# Altium PCB Staj.PcbDoc
Units mil, origin at the board's own origin, x right, y up, seen from the top; angles counter-clockwise.
Board outline 2510.03 x 1860.03 mil, 2 copper layers (Top Layer, Bottom Layer); 26 components, 16 nets, 122 pads, 35 vias.
Unrouted connection lines stored in the file: 1.
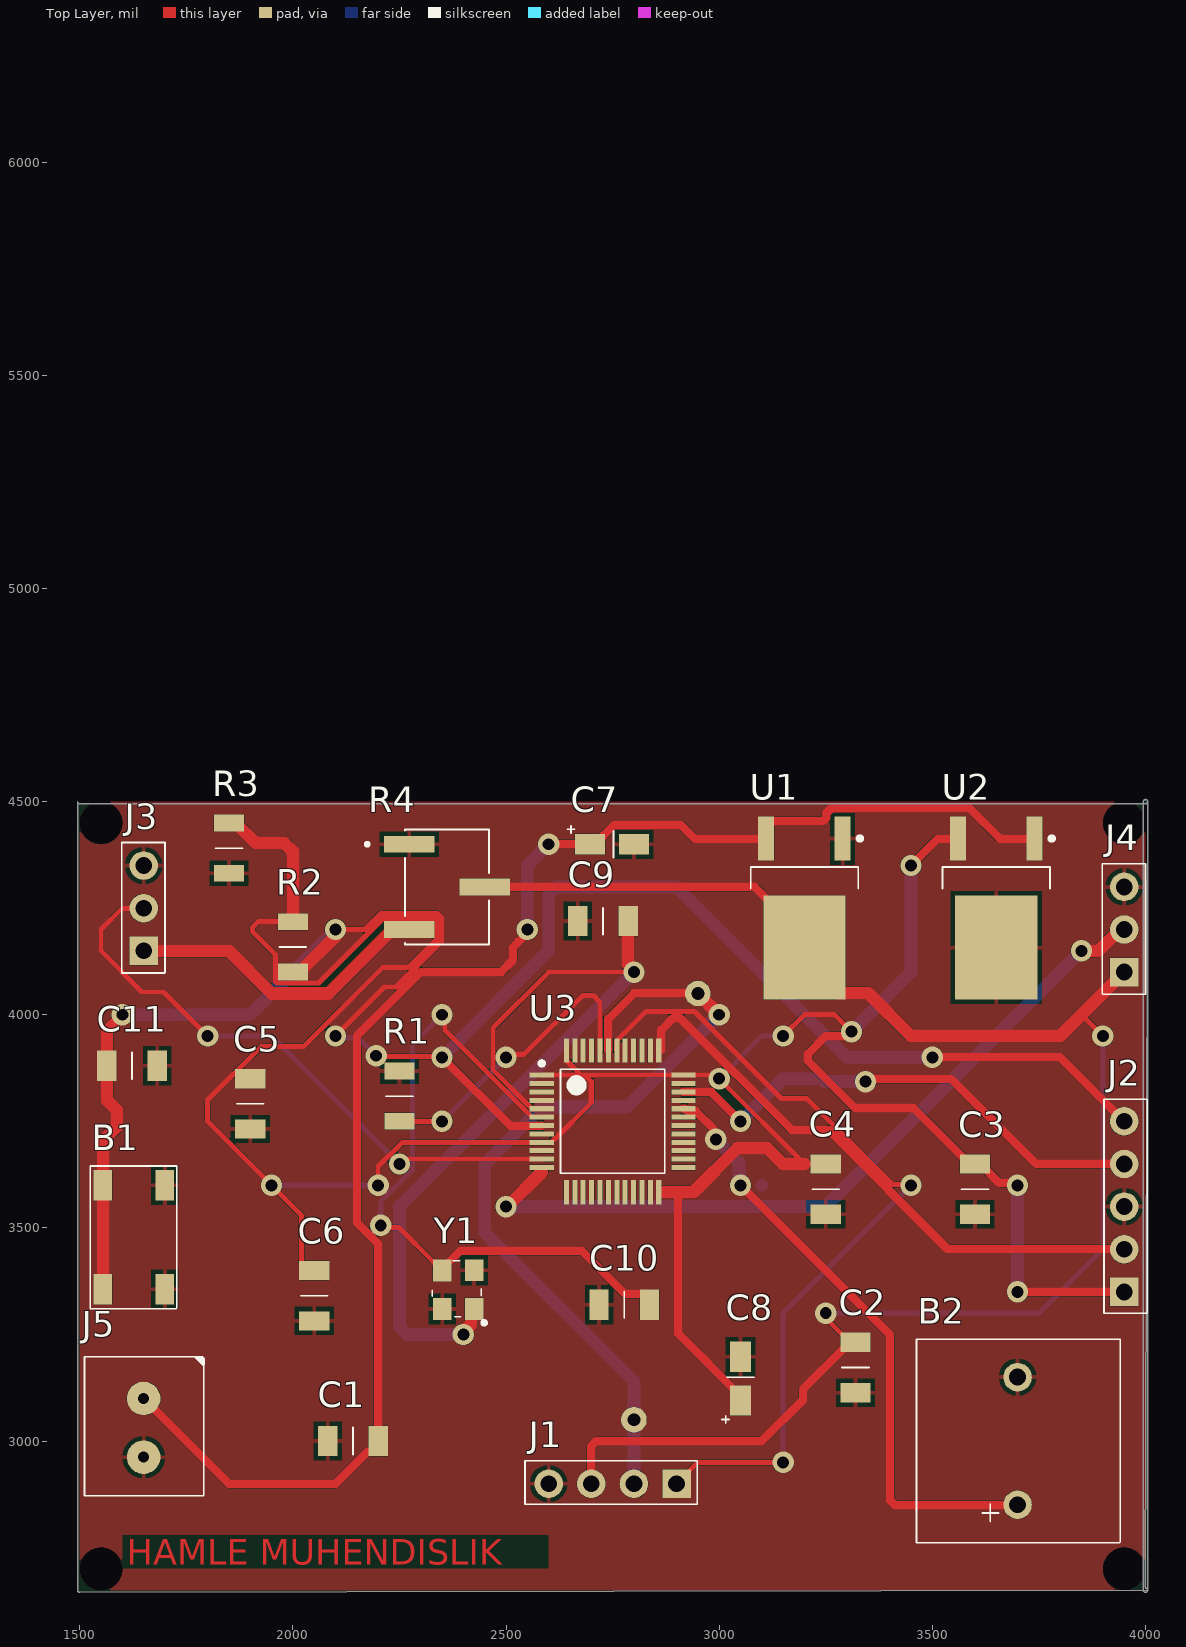
[diagram p0: Top Layer view]
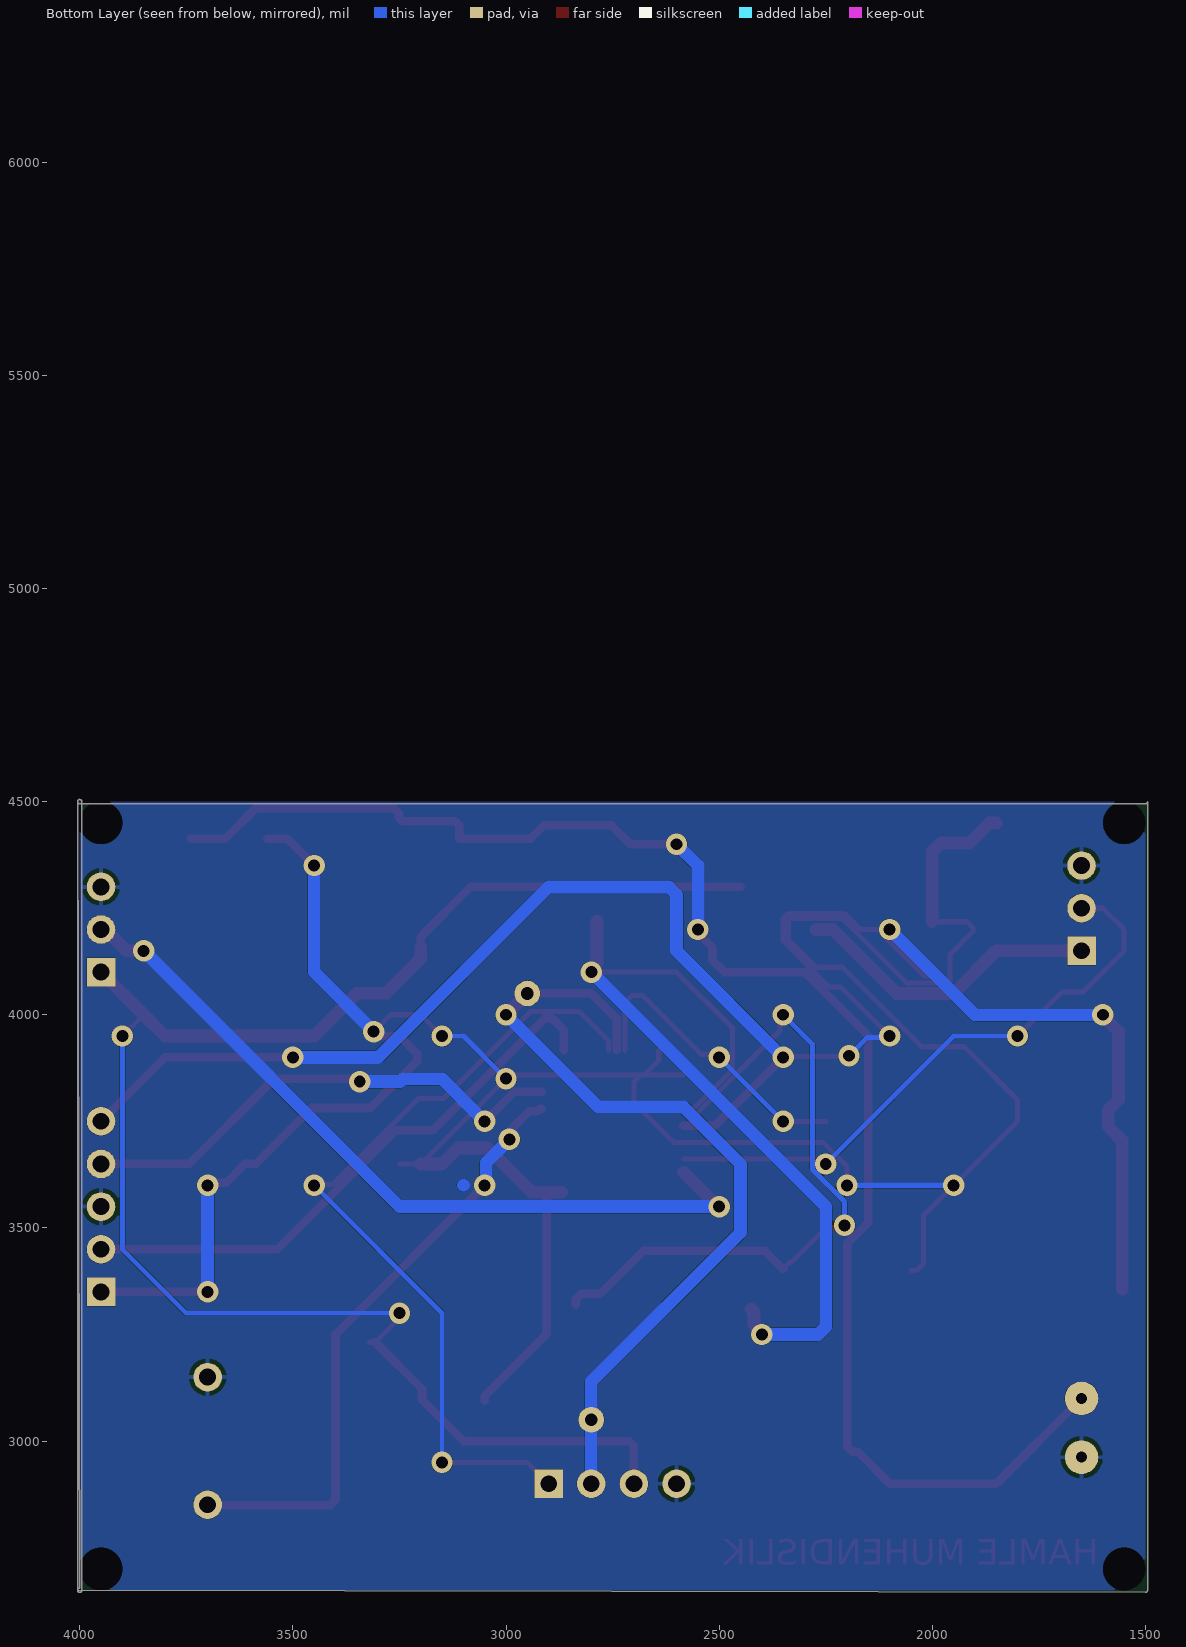
[diagram p1: Bottom Layer view, seen from below]
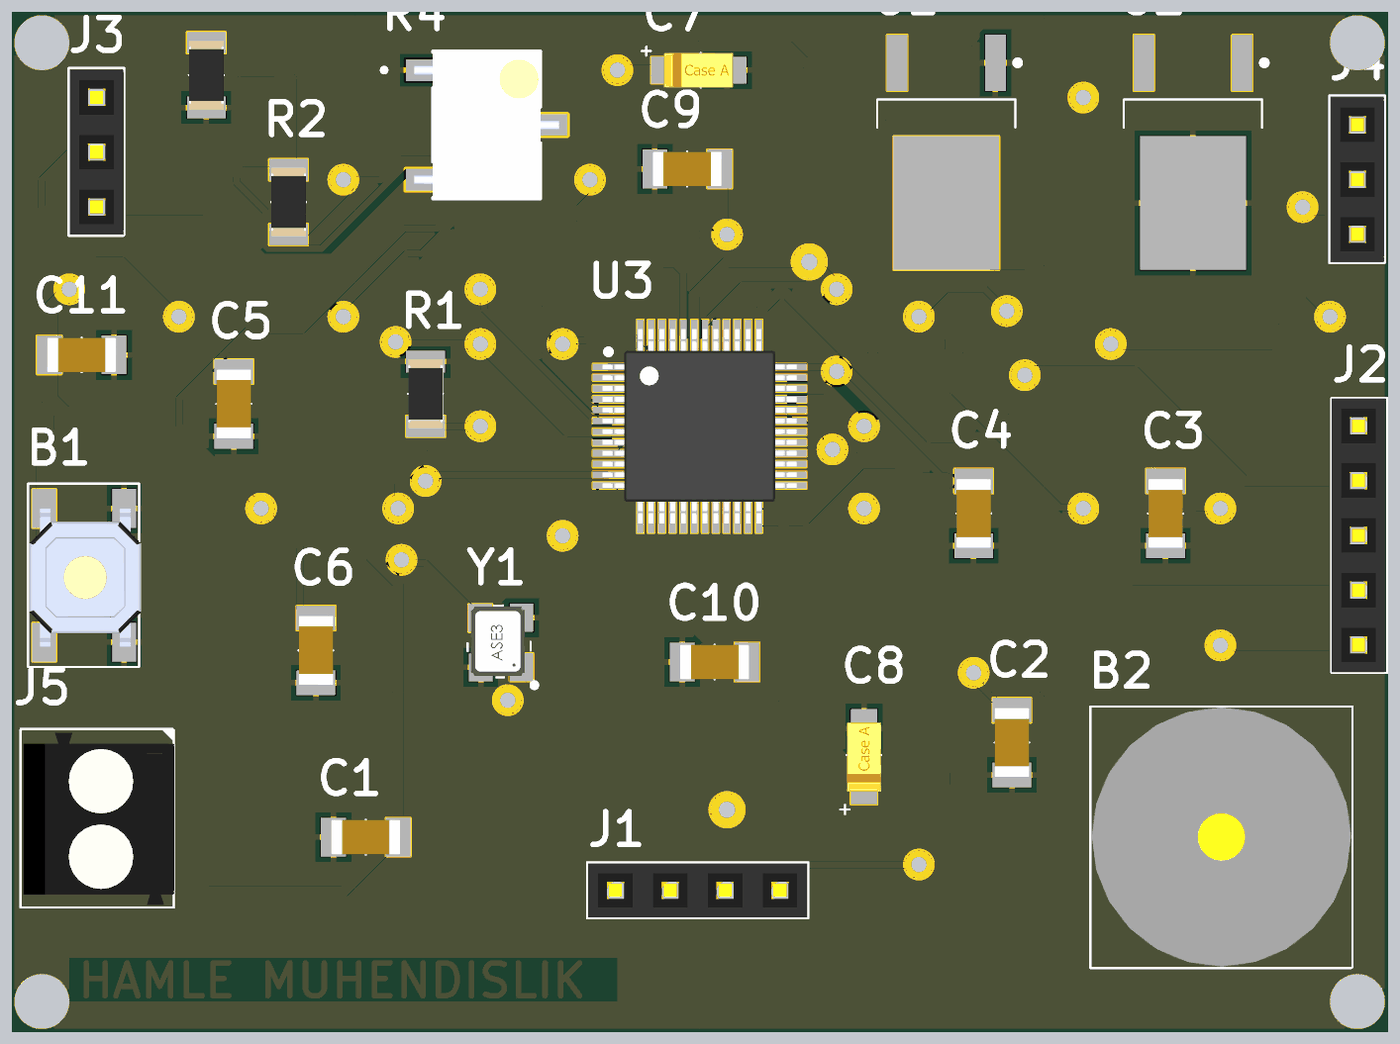
[diagram p2: 3D render of the assembled board from above, using the file's embedded part models]

## Layer stack, top to bottom
Top Solder: solder mask 0.4, Solder Resist, Dk 3.5
Top Layer: signal copper 1.4
Dielectric 1: dielectric 12.6, FR-4, Dk 4.8
Bottom Layer: signal copper 1.4
Bottom Solder: solder mask 0.4, Solder Resist, Dk 3.5

## Board outline
1500,2644.99 cw(c1500,2650) 1494.98,2650 1494.98,4500 ccw(c1500,4500) 1500,4494.98 4000,4494.98 ccw(c4000,4500) 4005.01,4500 ccw(c4000,4500) 4000,4505.02 ccw(c4000,4500) 3994.99,4500 3994.99,4494.98 3994.98,2655.01 3994.98,2650 ccw(c4000,2650) 4000,2644.99 ccw(c4000,2650) 4005.01,2650 4005.01,2650.03 4005.01,4500 4000,2655.01 cw(c4000,2650) 4005.01,2650.03 cw(c4000,2650)

## Design rules (kind name [scope] priority, off if disabled: settings)
Clearance [All] p1: gap=0 ignorepadtopadclearanceinfootprint=FALSE
HoleToHoleClearance [All] p1: gap=0 allowstackedmicrovias=TRUE
MinimumSolderMaskSliver [All] p1: minsoldermaskwidth=1
PolygonConnect [All] p1: connectstyle=Relief reliefconductorwidth=10 reliefentries=4 polygonreliefangle="90 Angle" airgapwidth=10
RoutingVias [All] p1: holewidth=28 width=50 viastyle="Through Hole" minholewidth=28 minwidth=50 maxholewidth=28 maxwidth=50
ShortCircuit [All] p1: allowed=TRUE
SilkToSilkClearance [All] p1: silktosilkclearance=0
SilkToSolderMaskClearance [IsPad] p1: minsilkscreentomaskgap=0 clearancetoexposedcopper=TRUE
SolderMaskExpansion [All] p1: expansion=4 istentingtop=FALSE
UnRoutedNet [All] p1: checkbadconnections=TRUE
Width [All] p1: maxlimit=30 minlimit=10 preferedwidth=12 minimp=50.000000 maximp=50.000000 favimp=50.000000
24 further rules are at their usual default settings.

## Components (designator, comment, footprint, x,y, rotation, side; value= is the part's Value field where it differs from the comment)
B1 "Push Button" "PUSB BUTTON-SMD" 1554.33,3355.91 r90 top
B2 "Buzzer 5v" "Buzzer 5v" 3700,2850.79 r90 top
C1 "330 nF C1206" C1206 2118.31,3019.69 r0 top
C2 "0.1 uF C1206" C1206 3300,3150 r90 top
C3 "0.1 uF C1206" C1206 3580.31,3568.31 r90 top
C4 "0.1 uF C1206" C1206 3230.31,3568.31 r90 top
C5 "0.1 uF C1206" C1206 1880.31,3768.31 r90 top
C6 "0.1 uF C1206" C1206 2030.31,3318.31 r90 top
C7 "10 uF - Tantal" "C1206- TANTAL" 2751.97,4400 r0 top
C8 "10 uF - Tantal" "C1206- TANTAL" 3050,3150 r90 top
C9 "10 uF" C1206 2750,4200 r180 top
C10 "10 uF" C1206 2800,3300 r180 top
C11 "0.1 uF C1206" C1206 1600,3900 r0 top
J1 "Header 2.54 1x4" "Header 2.54 1x4" 2880.32,2871.46 r180 top
J2 "Header 2.54 1x5" "Header 2.54 1x5" 3950,3350 r90 top
J3 "Header 2.54 1x3" "Header 2.54 1x3" 1649.02,4150 r90 top
J4 "Header 2.54 1x3" "Header 2.54 1x3" 3949.02,4100 r90 top
J5 "Klemens 1x2 3.5mm" "Klemens 1x2 - 3.5mm" 1651.97,3037.01 r270 top
R1 "10K R1206" "R1206 Resıstor" 2250,3806.1 r90 top
R2 "10K R1206" "R1206 Resıstor" 2000,4162.01 r270 top
R3 "10K R1206" "R1206 Resıstor" 1850,4387.99 r90 top
R4 "TS63Y500KT20" TRIM_TS63Y500KT20 2361.42,4300 r0 top
U1 "LD108633 DPAK" DPAK228P972X230-3N 3200,4250 r270 top
U2 "L7805-DPAK" DPAK228P972X230-3N 3650,4250 r270 top
U3 "STM32F101" LQFP48-STM 2750,3750 r0 top
Y1 "8 MHz 12.5 pf Osc" "8 MHZ Osc." 2405.8,3348.69 r90 top

## Footprints (in the part's own frame and the unit in brackets; to place one, negate y for a bottom-side part, rotate by r counter-clockwise, add the part's x,y. Pads: shape width x height; smd on the part's side, far side on the other; paste and mask are expansions set on the pad)
"8 MHZ Osc." [mm]
  rect 1.3x1.1 smd mask+0.05: 1(-0.981,-0.49) 2(1.319,-0.49) 3(1.303,1.417) 4(-0.986,1.401)
  silkscreen extent -1.91,-1.19 1.88,2.01, body extent -1.38,-0.64 1.82,1.86, height 1.22
"Buzzer 5v" [mm]
  round 1.7 hole 1 mask+0.05: 1(0,0) 2(7.6,0)
  silkscreen extent -2.27,-6.12 9.85,6.02, body extent -2.2,-6.05 9.8,5.95, height 9.5
C1206 [mm]
  rect 1.15x1.8 smd mask+0.05: 1(-0.925,-0.5) 2(2.075,-0.5)
  silkscreen extent 0.58,-1.3 0.58,0.31, body extent -1.02,-1.3 2.18,0.3, height 1
"C1206- TANTAL" [mm]
  rect 1.8x1.23 smd mask+0.05: 1(-1.4,0) 1(-1.4,0) 2(1.22,0)
  silkscreen extent -2.74,-0.8 0,1.1, body extent -1.7,-0.8 1.5,0.8, height 1.62
DPAK228P972X230-3N [mm] "D-PAK, 3-Pads, Body 6,40x6,56mm (max), IPC Medium Density"
  rect 2.6x0.95 smd mask+0.05: 1(-4.15,2.28) 2(-4.15,-2.28)
  rect 6.2x4.9 smd mask+0.05: 3(2.35,0)
  silkscreen extent -4.27,-3.2 -1.15,3.43, body extent -2.5,-3.2 4.1,3.2, height 2.3
"Header 2.54 1x3" [mm]
  rect 1.7x1.7 hole 1 mask+0.05: 1(0,-0.025)
  round 1.7 hole 1 mask+0.05: 2(2.54,-0.025) 3(5.08,-0.025)
  silkscreen extent -1.33,-1.3 6.45,1.28, body extent -1.26,-1.27 6.36,1.23, height 9.1
"Header 2.54 1x4" [mm]
  rect 1.7x1.7 hole 1 mask+0.05: 1(-0.5,-0.725)
  round 1.7 hole 1 mask+0.05: 2(2.04,-0.725) 3(4.58,-0.725) 4(7.12,-0.725)
  silkscreen extent -1.73,-2.1 8.52,0.5, body extent -1.68,-2.05 8.48,0.45, height 9.1
"Header 2.54 1x5" [mm]
  rect 1.7x1.7 hole 1 mask+0.05: 1(0,0)
  round 1.7 hole 1 mask+0.05: 2(2.54,0) 3(5.08,0) 4(7.62,0) 5(10.16,0)
  silkscreen extent -1.28,-1.37 11.48,1.2, body extent -1.25,-1.3 11.45,1.2, height 9.1
"Klemens 1x2 - 3.5mm" [mm]
  round 2 hole 0.65: 1(-1.6,-0.05) 2(1.9,-0.05)
  silkscreen extent -4.11,-3.58 4.2,3.58, body extent -3.9,-3.45 4.09,3.55, height 8.9
LQFP48-STM [mm] "TSQFP, 48-Leads, Body 7,00x7,00mm, Pitch 0,50mm, IPC Medium Density"
  rect 1.45x0.3 smd mask+0.05: 1(-4.225,2.75) 2(-4.225,2.25) 3(-4.225,1.75) 4(-4.225,1.25) 5(-4.225,0.75) 6(-4.225,0.25) 7(-4.225,-0.25) 8(-4.225,-0.75) 9(-4.225,-1.25) 10(-4.225,-1.75) 11(-4.225,-2.25) 12(-4.225,-2.75) 25(4.225,-2.75) 26(4.225,-2.25) 27(4.225,-1.75) 28(4.225,-1.25) 29(4.225,-0.75) 30(4.225,-0.25) 31(4.225,0.25) 32(4.225,0.75) 33(4.225,1.25) 34(4.225,1.75) 35(4.225,2.25) 36(4.225,2.75)
  rect 0.3x1.45 smd mask+0.05: 13(-2.75,-4.225) 14(-2.25,-4.225) 15(-1.75,-4.225) 16(-1.25,-4.225) 17(-0.75,-4.225) 18(-0.25,-4.225) 19(0.25,-4.225) 20(0.75,-4.225) 21(1.25,-4.225) 22(1.75,-4.225) 23(2.25,-4.225) 24(2.75,-4.225) 37(2.75,4.225) 38(2.25,4.225) 39(1.75,4.225) 40(1.25,4.225) 41(0.75,4.225) 42(0.25,4.225) 43(-0.25,4.225) 44(-0.75,4.225) 45(-1.25,4.225) 46(-1.75,4.225) 47(-2.25,4.225) 48(-2.75,4.225)
  silkscreen extent -4.35,-3.1 3.1,3.57, body extent -4.5,-4.5 4.5,4.5, height 1.6
"PUSB BUTTON-SMD" [mm]
  rect 1.8x1.1 smd mask+0.05: 1(0,0) 2(6.2,0) 3(0,-3.7) 4(6.2,-3.7)
  silkscreen extent -1.15,-4.4 7.35,0.75, body extent -0.2,-4.5 6.2,0.7, height 1.5
"R1206 Resıstor" [mm]
  rect 1x1.8 smd mask+0.05: 1(-1.425,0) 2(1.575,0)
  silkscreen extent 0.08,-0.8 0.08,0.81, body extent -1.52,-0.8 1.68,0.81, height 0.55
TRIM_TS63Y500KT20 [mm]
  rect 3x1 smd: 1(-2.25,2.54) 2(2.25,0) 3(-2.25,-2.54)
  silkscreen extent -4.85,-3.42 2.5,3.42, body extent -3.35,-3.42 3.35,3.42, height 8

## Part data
B1: "Smd Push Button", Satın Alma Linki=https://urun.n11.com/diger/mini-pushbutton-switch-smd-P227461537?gclid=Cj0KCQjwkoDmBRCcARIsAG3xzl8Y_-jeD7HocNM6lvuZ_rVp83568XPGtNzlPwXWLph8oCRqo0yh87UaApZYEALw_wcB&gclsrc=aw.ds
R4: Package=None, Availability=Unavailable, MF="{'manufacturer': u'Vishay Dale'}", MP=TS63Y500KT20, Price=None
U1: "LD1086 3.3V REGULATOR"
U2: "L7805 5V REGULATOR. SMD PAKET"
U3: "STM32F101 48 PİNLİ MİKROİŞLEMCİ"

## Free pads (board coordinates)
  round 0 hole 100: 5(1550,2700) 5(1550,4450) 5(1550,4450) 5(1550,6200) 5(3950,2700) 5(3950,4450)
  round 60 hole 30: 6(2950,4050) 7(2800,3050)

## Via types
v1: diameter 50, hole 28, Top Layer to Bottom Layer, 35 vias

## Nets (pads, with @x,y where several pads share a name; then routed paths per layer and width w, separated by ;. In a path a pad name is that pad's centre, name@x,y a point inside that pad or via, vN(x,y) a via of type N, cw(c..) or ccw(c..) an arc to the next point about the centre after c; other vN are vias at no path point)
3.3V: C3.2 C4.2 C5.2 C6.2 C8.1 J2.1 R2.1 R3.2 U2.2 U3.1 U3.9 U3.24 U3.36 U3.48 | length 7176.4
  Top Layer w12: R2.1 1918.11,4218.11 1904.97,4204.97 1904.97,4195.03 1958.57,4141.43 1958.57,4077.83 1962.08,4074.31 2059.92,4074.31 2211.29,4225.69 2334.37,4225.69 2337.89,4222.17 2337.89,4177.83 2271.49,4111.43 2211.43,4111.43 2025,3925 1925,3925 1800,3800 1800,3750 v1(1950,3600) 2020.57,3529.43 2020.57,3416.64 2037.2,3400 C6.2 ; v1(2200,3600) 2200,3643.84 2256.95,3700.79 U3.9 2606.11,3700.79 2613.89,3708.57 2614.69,3708.57 2700,3793.88 2700,3842.97 2684.7,3858.27 ; U3.1 2676.55,3858.27 ; U3.48 2641.83,3916.24 2641.83,3893 2676.55,3858.27 ; v1(3150,3950) 3200,4000 3270.71,4000 3302.24,3968.47 v1@3302.24,3960.36 ; C4.2 3200,3650 v1(3000,3850) 2989.72,3850 2981.45,3858.27 U3.36 2684.7,3858.27 ; 2676.55,3858.27 2684.7,3858.27
  Top Layer w20: 2904.24,3583.66 2904.24,3251.86 3050,3106.1 C8.1@3050,3094.88 ; v1@3291.88,3950 3250,3950 3208.28,3908.28 3208.28,3891.72 3318.68,3781.32 3455.89,3781.32 3587.2,3650 C3.2 3612.8,3650 3657.06,3605.74 3694.26,3605.74 v1(3700,3600) ; v1(3450,4350) 3513.39,4413.39 U2.2 ; v1(3700,3350) J2.1
  Top Layer w30: R3.2 1865.75,4450 1912.86,4402.89 1979.54,4402.89 2000,4382.43 R2.1 ; 2869.49,3583.66 2904.24,3583.66 2939,3583.66 3042.91,3687.57 3112.43,3687.57 3150,3650 3200,3650
  Bottom Layer w12: v1(1950,3600) v1(2200,3600) ; v1(3000,3850) 3100,3950 v1(3150,3950)
  Bottom Layer w30: v1(3310.36,3960.36) 3450,4100 v1(3450,4350) ; v1(3700,3350) v1(3700,3600)
5V: C2.2 J1.3 J4.1 R4.2 U1.3 | length 3935.1
  Top Layer w12: v1(3250,3300) 3257.27,3292.73 3257.27,3281.31 3306.89,3231.69 C2.2 ; 3850,4000 v1(3900,3950)
  Top Layer w20: R4.2 3083.07,4300 3200,4183.07 U1.3 ; J1.3 2700,2988.28 2711.72,3000 3100,3000 3197.13,3097.13 3197.13,3121.93 C2.2@3306.89,3231.69
  Top Layer w30: U1.3 3200,4131.89 3281.46,4050.43 3349.57,4050.43 3450,3950 3800,3950 3850,4000 J4.1
  Bottom Layer w12: v1(3250,3300) 3750,3300 3900,3450 v1(3900,3950)
9V: C1.2 C7.1 J5.1 U1.2 U2.1 | length 3442
  Top Layer w20: J5.1 1850,2900 2100,2900 2174.57,2974.57 2187.36,2974.57 2200,2987.2 C1.2 2200,3462.72 2150,3512.72 2150,3950 ; 2300,4100 2488.28,4100 2515.98,4127.69 2515.98,4157.86 2550,4191.88 v1(2550,4200) ; v1(2600,4400) 2696.85,4400 2708.07,4400 2752.28,4444.21 2911.5,4444.21 2942.32,4413.39 U1.2 3110.24,4445.14 3118.94,4453.84 3243.19,4453.84 3251.06,4461.72 3251.06,4472.85 3262.78,4484.57 3587.22,4484.57 3658.4,4413.39 U2.1
  Bottom Layer w30: v1(2550,4200) 2550,4350 v1(2600,4400)
GND: B1.3 B1.4 B2.2 C1.1 C2.1 C3.1 C4.1 C5.1 C6.1 C7.2 C8.2 C9.2 C10.2 C11.2 J1.4 J2.3 J3.3 J4.3 J5.2 R1.2 R3.1 R4.1 U1.1 U2.3 Y1.2 Y1.4 | length 212.1
  Top Layer w20: 2150,3950 2300,4100
NetB1_1: B1.1 B1.2 C11.1 J2.5 R2.2 U3.7 | length 4724.4
  Top Layer w12: v1(2100,3950) 2215.07,4065.07 2242.1,4065.07 2349.89,4172.86 2349.89,4227.14 2339.35,4237.69 2206.32,4237.69 2168.64,4200 v1(2100,4200) ; v1(2195.4,3903.85) 2197.33,3901.93 2348.07,3901.93 v1(2350,3900)
  Top Layer w20: v1(2350,3900) 2509.84,3740.16 U3.7 ; v1(3500,3900) 3800,3900 J2.5
  Top Layer w30: B1.1 B1.2 1554.33,3704.33 1587.57,3737.57 1587.57,3775.89 1563.58,3799.88 C11.1 1563.58,3960.75 1600,3997.17 v1(1600,4000) ; R2.2 2015.75,4100 2100,4184.25 v1(2100,4200)
  Bottom Layer w12: v1(2100,3950) 2104.03,3945.97 2153.28,3945.97 v1(2195.4,3903.85)
  Bottom Layer w30: v1(1600,4000) 1900,4000 v1(2100,4200) ; v1(2350,3900) 2600,4150 2600,4282.43 2617.57,4300 2900,4300 3300,3900 v1(3500,3900)
NetB2_1: B2.1 U3.32 | length 1437
  Top Layer w20: U3.32 2920.47,3779.53 2926.69,3773.31 2945.92,3773.31 2986.57,3732.65 2986.57,3713.43 v1(2992.31,3707.69) ; v1(3050,3600) 3400,3250 3400,2861.72 3411.72,2850 3699.21,2850 B2.1
  Bottom Layer w30: v1(2992.31,3707.69) 3046.17,3653.83 3046.17,3603.83 v1(3050,3600)
NetC9_1: C9.1 U3.5 Y1.1 | length 2046
  Top Layer w12: U3.5 2561.21,3779.53 2553.43,3787.31 2552.63,3787.31 2469,3870.94 2469,3969 2600,4100 2794.59,4100 v1@2800,4105.41
  Top Layer w30: v1(2400,3250) 2400,3255.41 2418.43,3273.84 2418.43,3303.41 Y1.1 ; C9.1 2786.42,4118.99 v1@2800,4105.41
  Bottom Layer w30: v1(2400,3250) 2267.57,3250 2250,3267.57 2250,3550 v1(2800,4100)
NetJ1_1: J1.1 U3.42 | length 1955.5
  Top Layer w12: U3.42 2759.84,3938.79 2767.62,3946.57 2767.62,3947.37 2827.97,4007.72 2942.28,4007.72 3146.36,3803.64 3205.35,3803.64 3407,3601.98 3448.02,3601.98 v1(3450,3600) ; J1.1 2950,2950 v1(3150,2950)
  Bottom Layer w12: v1(3150,2950) 3150,3300 v1(3450,3600)
NetJ1_2: J1.2 pad.6 pad.7 U3.43 | length 1969.1
  Top Layer w20: U3.43 2740.16,3990.16 2800,4050 pad.6
  Top Layer w30: pad.6 v1(3000,4000)
  Bottom Layer w30: J1.2 pad.7 2800,3139.41 2450,3489.41 2450,3650 2583.44,3783.44 2783.44,3783.44 v1(3000,4000)
NetJ2_2: J2.2 U3.37 | length 1369.3
  Top Layer w20: 2864.49,3916.34 2864.49,3964.49 2891.72,3991.72 2908.28,3991.72 3170.51,3729.49 3256.87,3729.49 3536.36,3450 J2.2
NetJ2_4: J2.4 U3.34 | length 1192.1
  Top Layer w20: U3.34 2981.1,3818.9 v1(3050,3750) ; v1(3343.18,3843.18) 3350,3850 3543.65,3850 3743.65,3650 J2.4
  Bottom Layer w30: v1(3050,3750) 3150,3850 3240.47,3850 3247.29,3843.18 v1(3343.18,3843.18)
NetJ3_1: J3.1 R4.3 | length 726.4
  Top Layer w30: J3.1 1850,4150 1950,4050 2083.46,4050 2233.46,4200 R4.3
NetJ3_2: J3.2 U3.11 | length 1416.2
  Top Layer w12: J3.2 1600,4250 1550,4200 1550,4150 1646.36,4053.64 1696.36,4053.64 v1(1800,3950) ; v1(2250,3650) 2260.28,3650 2271.7,3661.42 U3.11
  Bottom Layer w12: v1(1800,3950) 1950,3950 v1(2250,3650)
NetJ4_2: J4.2 U3.12 | length 1836.2
  Top Layer w30: v1(2500,3550) 2503.15,3550 2583.66,3630.51 ; v1(3850,4150) 3890.01,4150 3940.01,4200 J4.2
  Bottom Layer w30: v1(2500,3550) 3250,3550 v1(3850,4150)
NetR1_1: R1.1 U3.44 | length 712.3
  Top Layer w12: R1.1 v1(2350,3750) ; v1(2500,3900) 2507.27,3907.27 2542.38,3907.27 2680.14,4045.03 2704.97,4045.03 2720.47,4029.53 U3.44
  Bottom Layer w12: v1(2350,3750) v1(2500,3900)
OUT: C10.1 U3.6 Y1.3 | length 1635.4
  Top Layer w12: v1(2206.11,3506.11) 2211.32,3500.89 2249.11,3500.89 2330.41,3419.59 2334.35,3419.59 2350,3403.94 Y1.3 ; v1(2350,4000) 2357.27,3992.73 2357.27,3962.98 2552.63,3767.62 2553.43,3767.62 U3.6@2561.12,3759.94
  Top Layer w20: Y1.3@2350,3403.94 2392.26,3446.2 2678.15,3446.2 2779.23,3345.12 2823.78,3345.12 2836.42,3332.48 C10.1
  Bottom Layer w12: v1(2206.11,3506.11) 2206.11,3562.27 2281,3637.16 2281,3931 v1(2350,4000)
pads on no net: U3.2 U3.3 U3.4 U3.8 U3.10 U3.13 U3.14 U3.15 U3.16 U3.17 U3.18 U3.19 U3.20 U3.21 U3.22 U3.23 U3.25 U3.26 U3.27 U3.28 U3.29 U3.30 U3.31 U3.33 U3.35 U3.38 U3.39 U3.40 U3.41 U3.45 U3.46 U3.47
copper on no net: | length 0

## Polygon pours and split planes (outlines as drawn)
GND on Bottom Layer "GND_L02_P003" (solid, pour order 3): 1500,4500 4000,4500 4000,2650 1500,2650
no net on Bottom Layer "NONET_L02_P001" (solid, pour order 1): 1500,4500
GND on Top Layer "GND_L01_P002" (solid, pour order 2): 1500,4500 4000,4500 4000,2650 1500,2650

## Other copper
Top Layer:
  text "HAMLE MUHENDISLIK" at 1610,2710 h60

## Silkscreen, mask and mechanical layers (free items; w line width, h text height)
Mechanical 1:
  lines w10: 1500,2650 2125,2650 3375,2650 4000,2650 4000,4500 1500,4500 1500,2650